# EAGLE board PWM (EAGLE 5.11)
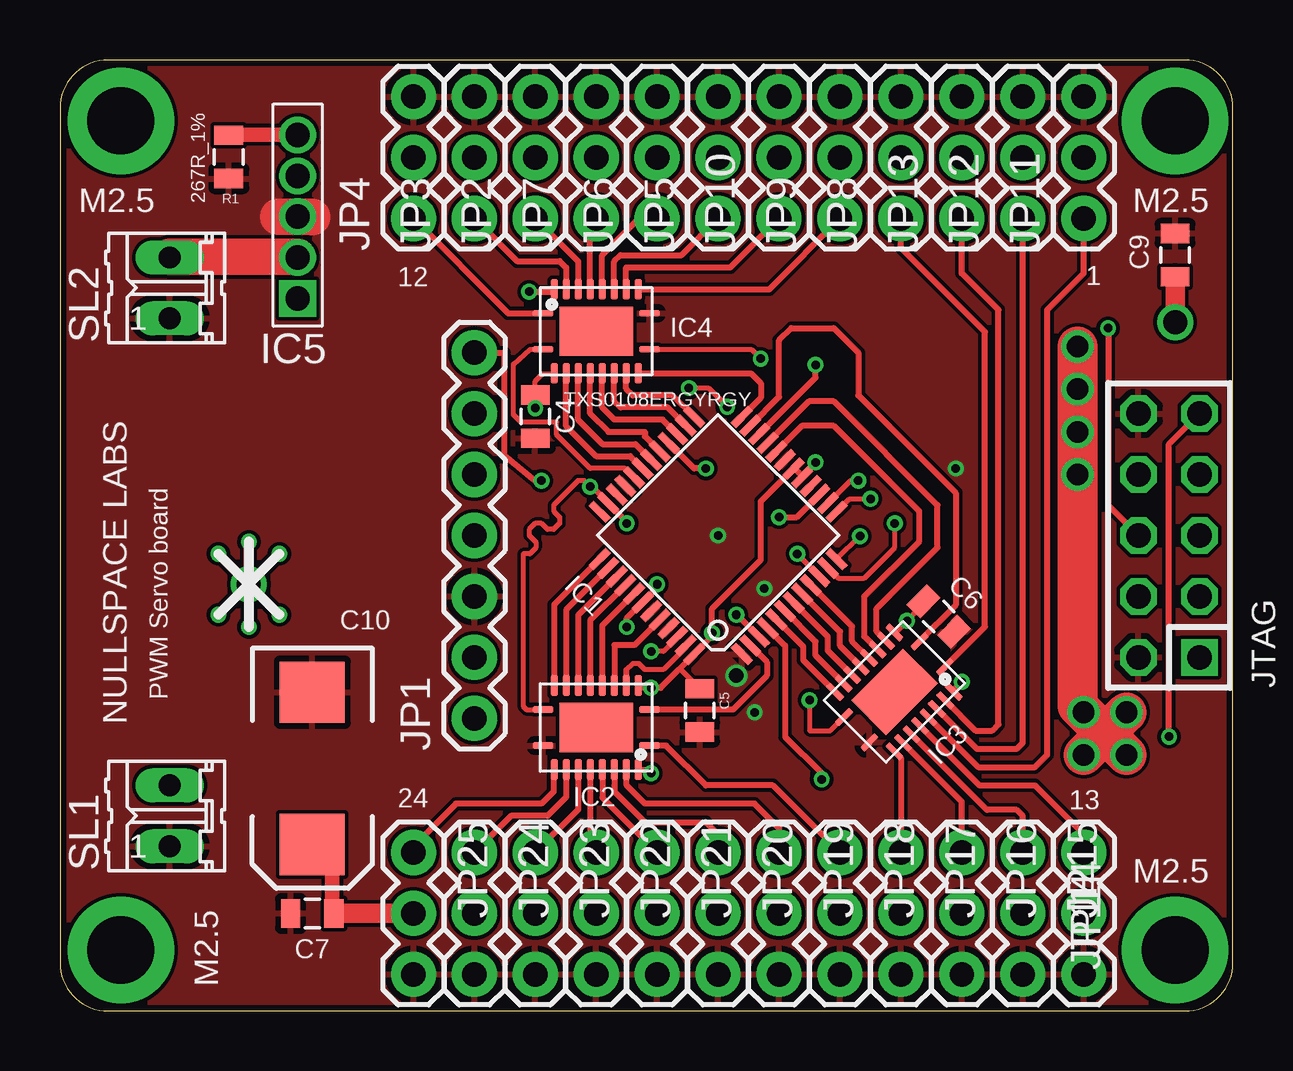
[diagram p0: board, top side]
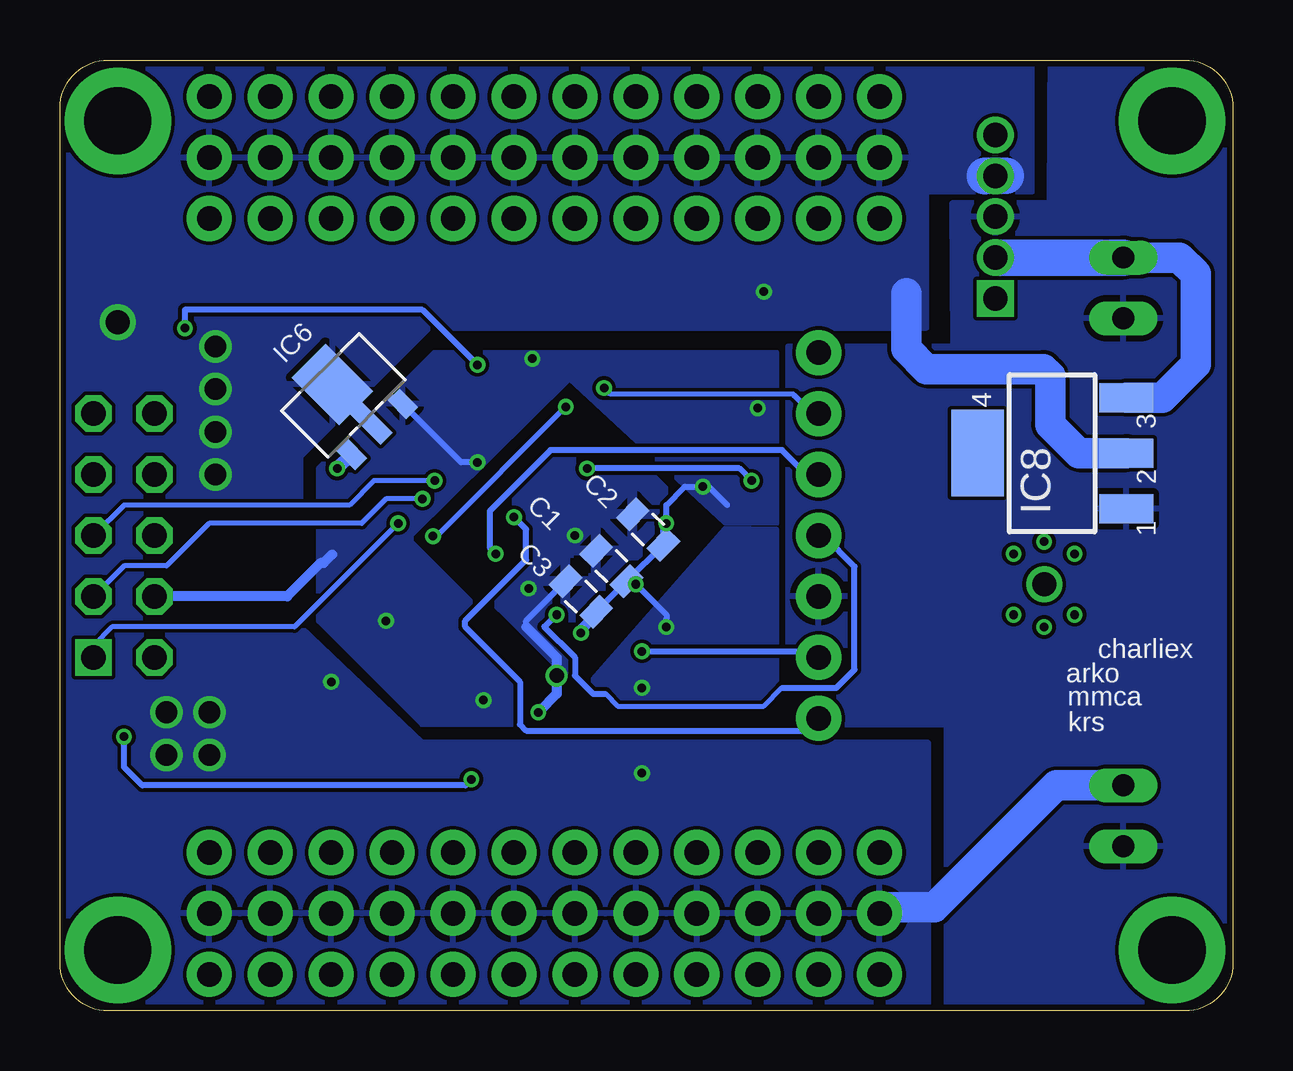
[diagram p1: board, bottom side, seen from below]

Size 48.89 x 39.62 mm. Coordinates in mm from the lower left corner, seen from the top.
Outline: 48.89,37.62 arc90 46.89,39.62 2,39.62 arc90 0,37.62 0,2 arc90 2,0 46.89,0 arc90 48.89,2 48.89,37.62
Copper layers (1*16): Top 0.035mm / dielectric 1.5mm / Bottom 0.035mm
Design rules "ITead_rule": minimum track width 6mil, minimum drill 12mil, track to track 6mil, track to pad 6mil, pad to pad 6mil, via to via 6mil, smd to smd 0mil, copper to edge 10mil, drill to drill 10mil, minimum pad ring 10mil, minimum via ring 6mil, stop-mask expansion 2mil, vias tented up to drill 100mil, thermal gap 10mil

## Footprints (pad centres in the part's own frame; a part is rotated, then mirrored left to right if it is on the bottom)
0805 = smd 0.8 x 1.2: 1 -0.9,0; 2 0.9,0
EIA7343 = smd 2.55 x 2.7: A 3.17,0; C -3.17,0
TQFP48 = smd 1.016 x 0.305: 1 -4.191,2.794; 2 -4.191,2.286; 3 -4.191,1.778; 4 -4.191,1.27; 5 -4.191,0.762; 6 -4.191,0.254; 7 -4.191,-0.254; 8 -4.191,-0.762; 9 -4.191,-1.27; 10 -4.191,-1.778; 11 -4.191,-2.286; 12 -4.191,-2.794; 25 4.191,-2.794; 26 4.191,-2.286; 27 4.191,-1.778; 28 4.191,-1.27; 29 4.191,-0.762; 30 4.191,-0.254; 31 4.191,0.254; 32 4.191,0.762; 33 4.191,1.27; 34 4.191,1.778; 35 4.191,2.286; 36 4.191,2.794 | smd 0.305 x 1.016: 13 -2.794,-4.191; 14 -2.286,-4.191; 15 -1.778,-4.191; 16 -1.27,-4.191; 17 -0.762,-4.191; 18 -0.254,-4.191; 19 0.254,-4.191; 20 0.762,-4.191; 21 1.27,-4.191; 22 1.778,-4.191; 23 2.286,-4.191; 24 2.794,-4.191; 37 2.794,4.191; 38 2.286,4.191; 39 1.778,4.191; 40 1.27,4.191; 41 0.762,4.191; 42 0.254,4.191; 43 -0.254,4.191; 44 -0.762,4.191; 45 -1.27,4.191; 46 -1.778,4.191; 47 -2.286,4.191; 48 -2.794,4.191
RGY = smd 0.85 x 0.28: 1 -2.225,-0.75; 10 2.225,-0.75; 11 2.225,0.75; 20 -2.225,0.75 | smd 0.28 x 0.85: 2 -1.75,-1.75; 3 -1.25,-1.75; 4 -0.75,-1.75; 5 -0.25,-1.75; 6 0.25,-1.75; 7 0.75,-1.75; 8 1.25,-1.75; 9 1.75,-1.75; 12 1.75,1.75; 13 1.25,1.75; 14 0.75,1.75; 15 0.25,1.75; 16 -0.25,1.75; 17 -0.75,1.75; 18 -1.25,1.75; 19 -1.75,1.75 | smd 3.05 x 2.05: E@1 0,0
SLTS284E = drill 1.016 pad 1.27 square: 1 -3.404,0 | drill 1.016 pad 1.27 round: 2 -1.702,0; 3 0,0; 4 1.702,0 | drill 1.016 round: 5 3.404,0
SOT89-3L = smd 0.7 x 1.1: 1 -1.5,-1.75; 3 1.5,-1.75 | smd 0.7 x 1.8: 2 0,-1.4 | smd 2 x 2.8: 4 0,0.9
V-REG-3_SOT223 = smd 1.219 x 2.235: 1 -2.311,-3.099; 2 0,-3.099; 3 2.311,-3.099 | smd 3.6 x 2.2: 4 0,3.099
1X07 = drill 1.016 pad 1.88 round: 1 0,0; 2 2.54,0; 3 5.08,0; 4 7.62,0; 5 10.16,0; 6 12.7,0; 7 15.24,0
1X03 = drill 1.016 pad 1.88 round: 1 0,0; 2 2.54,0; 3 5.08,0
AVR-JTAG-10 = drill 1.016 square: 1 -5.08,-1.27 | drill 1.016 octagon: 2 -5.08,1.27; 3 -2.54,-1.27; 4 -2.54,1.27; 5 0,-1.27; 6 0,1.27; 7 2.54,-1.27; 8 2.54,1.27; 9 5.08,-1.27; 10 5.08,1.27
02P = drill 0.914 long: 1 -1.27,0; 2 1.27,0

## Placement (x,y rotation side)
C1  .1uf  [0805]  25.91,18.54 135 bottom
C2  .1uf  [0805]  24.38,20.07 135 bottom
C3  .1uf  [0805]  27.18,17.27 135 bottom
C4  .1uf  [0805]  19.81,24.77 270 top
C5  .1uf  [0805]  26.67,12.52 270 top
C6  .1uf  [0805]  36.63,16.43 315 top
C7  10uf  [0805]  10.52,4.06 180 top
C9  .1uf  [0805]  46.48,31.5 90 top
C10  100uf  [EIA7343]  10.52,10.11 270 top
IC1  AT32UC3L016/32/64  [TQFP48]  27.43,19.81 135 top
IC2  TXS0108ERGYRGY  [RGY]  22.35,11.81 180 top
IC3  TXS0108ERGYRGY  [RGY]  34.78,13.3 225 top
IC4  TXS0108ERGYRGY  [RGY]  22.35,28.32 0 top
IC5  PTR08100W  [SLTS284E]  9.91,33.1 90 top
IC6  AP1115  [SOT89-3L]  36.9,25.47 45 bottom
IC8  [V-REG-3_SOT223]  7.54,23.24 90 bottom
JP1  [1X07]  17.27,12.19 90 top
JP2  [1X03]  19.81,33.02 90 top
JP3  [1X03]  17.27,33.02 90 top
JP4  [1X03]  14.73,33.02 90 top
JP5  [1X03]  27.43,33.02 90 top
JP6  [1X03]  24.89,33.02 90 top
JP7  [1X03]  22.35,33.02 90 top
JP8  [1X03]  35.05,33.02 90 top
JP9  [1X03]  32.51,33.02 90 top
JP10  [1X03]  29.97,33.02 90 top
JP11  [1X03]  42.67,33.02 90 top
JP12  [1X03]  40.13,33.02 90 top
JP13  [1X03]  37.59,33.02 90 top
JP14  [1X03]  42.67,6.6 270 top
JP15  [1X03]  40.13,6.6 270 top
JP16  [1X03]  37.59,6.6 270 top
JP17  [1X03]  35.05,6.6 270 top
JP18  [1X03]  32.51,6.6 270 top
JP19  [1X03]  29.97,6.6 270 top
JP20  [1X03]  27.43,6.6 270 top
JP21  [1X03]  24.89,6.6 270 top
JP22  [1X03]  22.35,6.6 270 top
JP23  [1X03]  19.81,6.6 270 top
JP24  [1X03]  17.27,6.6 270 top
JP25  [1X03]  14.73,6.6 270 top
JTAG  AVR-JTAG-10  [AVR-JTAG-10]  46.23,19.81 90 top
R1  267R_1%  [0805]  7.04,35.59 270 top
SL1  [02P]  4.57,8.13 90 top
SL2  [02P]  4.57,30.12 90 top

## Library data of the parts
C1-C7 C9 C10 JP1 R1 = SparkFun
IC1 JTAG = atmel-avr32-michel
IC2-IC6 = PWM
IC8 = avrcanbus
JP2-JP25 = Speaker_shield
SL1 SL2 = con-amp-quick; OC_FARNELL: unknown; OC_NEWARK: unknown

## Nets
3V3: C1.1 C2.1 C3.1 C4.1 C5.1 C6.1 IC1.17 IC1.18 IC1.35 IC1.42 IC1.48 IC2.2 IC2.10 IC3.2 IC3.10 IC4.2 IC4.10 IC6.3 JTAG.4
A09: IC2.20 JP18.1
A11: IC4.15 JP6.1
A12: IC2.18 JP19.1
A13: IC4.14 JP5.1
A15: IC2.12 JP25.1
A16: IC2.13 JP24.1
A17: IC2.14 JP23.1
A18: IC2.16 JP21.1
A19: IC2.15 JP22.1
A20: IC4.13 JP10.1
A21: IC4.12 JP9.1
A22: IC3.16 JP11.1
B00: IC3.13 JP16.1
B02: IC3.14 JP15.1
B03: IC3.15 JP14.1
B04: IC3.18 JP13.1
B05: IC3.17 JP12.1
B06: IC4.17 JP2.1
B07: IC4.18 JP3.1
B08: IC4.20 JP4.1
B09: IC4.16 JP7.1
B10: IC3.20 JP8.1
B11: IC2.17 JP20.1
B12: IC3.12 JP17.1
BATT_IN: IC5.2 IC8.3 SL2.2
GND: C1.2 C2.2 C3.2 C4.2 C5.2 C6.2 C7.2 C9.2 C10.C IC1.1 IC1.19 IC1.33 IC1.43 IC1.45 IC2.11 IC3.11 IC4.11 IC5.3 IC6.1 IC8.1 JP1.3 JP2.3 JP3.3 JP4.3 JP5.3 JP6.3 JP7.3 JP8.3 JP9.3 JP10.3 JP11.3 JP12.3 JP13.3 JP14.3 JP15.3 JP16.3 JP17.3 JP18.3 JP19.3 JP20.3 JP21.3 JP22.3 JP23.3 JP24.3 JP25.3 JTAG.2 JTAG.10 R1.2 SL1.1 SL2.1
MISO/RX: IC1.28 JP1.7
MOSI/TX: IC1.12 JP1.6
N$5: IC5.5 R1.1
N$9: IC5.1
PA09: IC1.2 IC2.1
PA11: IC1.27 IC4.6
PA12: IC1.47 IC2.3
PA13: IC1.26 IC4.7
PA14: IC1.36
PA15: IC1.37 IC2.9
PA16: IC1.38 IC2.8
PA17: IC1.39 IC2.7
PA18: IC1.41 IC2.5
PA19: IC1.40 IC2.6
PA20: IC1.25 IC4.8
PA21: IC1.24 IC4.9
PA22: IC1.9 IC3.5
PB00: IC1.6 IC3.8
PB01: IC1.16
PB02: IC1.7 IC3.7
PB03: IC1.8 IC3.6
PB04: IC1.21 IC3.3
PB05: IC1.20 IC3.4
PB06: IC1.30 IC4.4
PB07: IC1.31 IC4.3
PB08: IC1.32 IC4.1
PB09: IC1.29 IC4.5
PB10: IC1.23 IC3.1
PB11: IC1.44 IC2.4
PB12: IC1.5 IC3.9
RESETN: IC1.22 JTAG.6
SCK: IC1.10 JP1.5
SPI_SS: IC1.3 JP1.4
TCK: IC1.11 JTAG.1
TDI: IC1.4 JTAG.9
TDO: IC1.13 JTAG.3
TMS: IC1.14 JTAG.5
TWCK: IC1.15 JP1.1
TWD: IC1.46 JP1.2
VREF: IC1.34
VREG: C7.1 C9.1 C10.A IC2.19 IC3.19 IC4.19 IC5.4 IC6.2 IC6.4 IC8.2 JP2.2 JP3.2 JP4.2 JP5.2 JP6.2 JP7.2 JP8.2 JP9.2 JP10.2 JP11.2 JP12.2 JP13.2 JP14.2 JP15.2 JP16.2 JP17.2 JP18.2 JP19.2 JP20.2 JP21.2 JP22.2 JP23.2 JP24.2 JP25.2 SL1.2

## Tracks (layer width: path | path; a pad name or v marks a point on that pad's centre or on a via)
3V3  (via drill 0.36)
  Top 0.203: IC4.2 20.6,26.54 20.12,26.54 19.81,26.24 C4.1 v19.81,25.12 | C5.1 25.86,14.23 25.8,14.23 | v35.31,16.26 36.04,16.99 C6.1 | IC4.10 28.82,27.57 v29.21,27.18 | IC3.10 32.11,11.68 31.24,11.68 v31.24,12.95 | IC2.10 19.44,12.56 19.3,12.7 19.3,19.05 19.58,19.05 19.84,19.3 19.84,19.53 19.56,19.81 19.56,20.07 19.81,20.32 20.07,20.32 20.32,20.07 20.57,20.07 20.83,20.32 20.83,20.57 20.57,20.83 20.57,21.08 21.59,22.1 21.84,22.1 v22.1,21.84
  Top 0.254: IC3.2 34.82,15.77 v35.31,16.26 | IC2.2 24.2,13.46 v24.64,13.46 25.03,13.46 25.8,14.23 IC1.48 27.18,15.61 v27.18,15.75 27.18,16.76 29.21,18.8 29.21,21.23 IC1.18 30.64,22.6 30.93,22.3 | v23.62,16 23.62,16.36 IC1.42 24.89,17.63 v24.89,17.78 | v22.1,21.84 22.17,21.84 IC1.35 23.62,20.39 v23.62,20.32 | 30.93,22.3 v31.5,22.86 | 30.93,22.3 IC1.17
  Bottom 0.203: v19.81,25.12 19.81,25.07
  Bottom 0.254: 23.62,16.36 v23.62,16 23.62,16.51 v24.89,17.78 25.27,18.16 C1.1 | C3.1 26.8,16.13 v27.18,15.75 27.18,16 C1.1 | IC6.3 32.17,22.86 v31.5,22.86 | C1.1 C2.1 23.75,20.19 v23.62,20.32 23.62,21.08 22.86,21.84 v22.1,21.84 21.84,21.84 21.08,21.08
  Bottom 0.406: JTAG.4 39.42,17.27 38.02,18.67 37.9,18.67 37.54,19.03
  pour Bottom: 21.16,20.35 27.66,26.37 34.29,19.81 34.29,19.56 27.69,12.95 27.43,12.95 21.13,20.12 19.05,20.07 19.05,11.94 33.78,11.94 38.1,16.26 38.1,22.61 33.27,27.43 19.05,27.43 19.05,20.32
A09
  Top 0.254: IC2.20 25.26,11.06 26.92,9.4 29.72,9.4 JP18.1
A11
  Top 0.254: IC4.15 22.6,31.49 24.13,33.02 JP6.1
A12
  Top 0.254: IC2.18 23.62,10.04 23.62,9.4 24.38,8.64 28.96,8.64 29.97,7.62 JP19.1
A13
  Top 0.254: IC4.14 23.1,31.23 23.37,31.5 25.91,31.5 JP5.1
A15
  Top 0.254: IC2.12 20.57,10.03 20.57,9.14 20.07,8.64 16.51,8.64 14.73,6.86 JP25.1
A16
  Top 0.254: IC2.13 21.1,8.91 21.08,8.89 20.32,8.13 18.8,8.13 JP24.1
A17
  Top 0.254: IC2.14 21.6,8.39 JP23.1
A18
  Top 0.254: IC2.16 22.61,8.89 JP21.1
A19
  Top 0.254: IC2.15 22.1,6.85 JP22.1
A20
  Top 0.254: IC4.13 23.6,30.97 23.62,30.99 27.94,30.99 JP10.1
A21
  Top 0.254: IC4.12 29.56,30.07 JP9.1
A22
  Top 0.254: IC3.16 38.27,10.16 40.64,10.16 41.15,10.67 41.15,29.21 42.67,30.73 JP11.1
B00
  Top 0.254: IC3.13 37.59,8.72 JP16.1
B02
  Top 0.254: IC3.14 38.64,8.38 39.88,8.38 40.13,8.13 JP15.1
B03
  Top 0.254: IC3.15 38.33,9.4 40.64,9.4 42.67,7.37 JP14.1
B04
  Top 0.254: JP13.1 37.59,30.73 39.12,29.21 39.12,11.94 38.86,11.68 38.16,11.68 IC3.18
B05
  Top 0.254: IC3.17 38.22,10.92 39.88,10.92 40.13,11.18 JP12.1
B06
  Top 0.254: IC4.17 21.6,31.23 JP2.1
B07
  Top 0.254: IC4.18 21.1,30.97 20.83,31.24 19.05,31.24 JP3.1
B08
  Top 0.254: IC4.20 18.68,29.07 JP4.1
B09
  Top 0.254: IC4.16 22.1,32.77 JP7.1
B10
  Top 0.254: IC3.20 38.56,16.01 38.56,28.3 35.05,31.8 JP8.1
B11
  Top 0.254: IC2.17 23.11,10.05 23.11,9.4 23.11,9.14 24.38,7.87 26.92,7.87 27.43,7.37 JP20.1
B12
  Top 0.254: IC3.12 35.05,10.55 JP17.1
BATT_IN
  Top 0.305: SL2.2 4.57,31.42
  Top 1.524: 4.57,31.42 9.91,31.42
  Bottom 1.27: SL2.2 2.23,31.39 1.55,30.71 1.55,26.95 2.95,25.55 IC8.3
  Bottom 1.524: IC5.2 SL2.2
GND  (via drill 0.36, 0.6)
  Top 1.524: 9.09,33.1 IC5.3 10.52,33.1 10.52,33.07
  Bottom 0.254: IC6.1 36.77,23.18 | C3.2 29.46,16.26 29.46,16
  Bottom 0.406: 29.46,16 28.19,14.73 v28.19,13.97 28.19,13.21 v28.96,12.45
  Bottom 0.559: 36.77,23.18 v37.34,22.61
  other vias: 27.43,19.81 29.36,17.6
  pour Top: 49.02,40.64 49.02,-1.02 -0.76,-0.76 -0.76,39.89 arc-90 0.24,40.89
  pour Bottom: -0.51,40.39 7.62,40.39 7.65,33.66 11.71,33.66 11.68,27.69 18.54,27.69 18.54,11.94 11.94,11.94 11.94,-0.76 -0.51,-0.76
  pour Bottom: 21.95,19.96 27.53,25.58 33.02,20.07 33.27,19.56 27.69,13.97
MISO/RX  (via drill 0.36)
  Top 0.254: JP1.7 18.52,27.43 18.52,23.17 19.81,22.1 v20.07,22.1 | IC1.28 26.43,22.61 v26.92,22.61
  Bottom 0.254: v20.07,22.1 20.57,22.61 v26.92,22.61
MOSI/TX  (via drill 0.36)
  Top 0.203: v27.81,25.17 27.03,25.96 v26.21,25.96 | IC1.12 33.33,19.79 v33.35,19.79
  Bottom 0.203: 18.29,25.65 18.34,25.71 25.96,25.71 v26.21,25.96 | v27.81,25.17 33.2,19.79 v33.35,19.79
  Bottom 0.254: 18.29,25.65 17.53,24.89 JP1.6
N$1  (via drill 2.79 pad 4.45)
  other vias: 46.48,37.08
N$2  (via drill 2.79 pad 4.45)
  other vias: 46.48,2.54
N$3  (via drill 2.79 pad 4.45)
  other vias: 2.54,2.54
N$4  (via drill 2.79 pad 4.45)
  other vias: 2.54,37.08
N$5
  Top 0.61: IC5.5 7.11,36.5 R1.1
N$6  (via drill 0.36, 1)
  Top 0.406: v7.87,17.78 v7.87,19.56 | v9.14,19.05 v7.87,17.78 | v7.87,17.78 v6.6,19.05 | v7.87,17.78 v6.6,16.51 | v7.87,17.78 v9.14,16.51 | v7.87,17.78 v7.87,16
PA09
  Top 0.254: IC2.1 28.05,12.56 29.46,13.97 29.46,14.55 IC1.2
PA11
  Top 0.254: IC1.27 25.12,24.64 23.11,24.64 22.6,25.15 IC4.6
PA12
  Top 0.203: 23.6,14.2 23.88,14.48 24.13,14.48 24.38,14.22 25.15,14.22 26.09,15.16 IC1.47
  Top 0.254: 23.6,14.2 IC2.3
PA13
  Top 0.254: IC1.26 25.33,25.15 23.37,25.15 23.1,25.41 IC4.7
PA15
  Top 0.254: IC1.37 20.6,16.93 IC2.9
PA16
  Top 0.254: IC1.38 21.1,16.71 IC2.8
PA17
  Top 0.254: IC1.39 21.6,16.5 IC2.7
PA18
  Top 0.254: IC1.41 22.6,16.06 IC2.5
PA19
  Top 0.254: IC1.40 22.1,16.28 IC2.6
PA20
  Top 0.254: IC4.8 23.6,25.93 23.88,25.65 25.54,25.65 IC1.25
PA21
  Top 0.254: IC1.24 29.21,25.54 29.21,26.16 28.8,26.57 IC4.9
PA22
  Top 0.254: IC1.9 33.02,16.02 33.02,15.41 IC3.5
PB00
  Top 0.254: IC1.6 31.5,15.39 31.5,14.82 IC3.8
PB02
  Top 0.254: IC1.7 32,15.6 32,15.02 IC3.7
PB03
  Top 0.254: IC1.8 32.51,15.81 32.51,15.21 IC3.6
PB04
  Top 0.254: IC3.3 34.04,15.81 34.04,16.76 36.58,19.3 36.58,21.08 32.26,25.4 31.22,25.4 IC1.21
PB05
  Top 0.254: IC3.4 33.53,15.61 33.53,17.27 35.81,19.56 35.81,20.83 32.26,24.38 30.93,24.38 IC1.20
PB06
  Top 0.254: IC1.30 23.98,23.62 22.61,23.62 21.6,24.63 IC4.4
PB07
  Top 0.254: IC1.31 23.77,23.11 22.35,23.11 21.1,24.36 IC4.3
PB08
  Top 0.203: IC1.32 23.56,22.61 22.1,22.61 20.7,24 20.7,24.54 19.23,24.54 18.9,24.84 18.9,26.95 19.59,27.57 IC4.1
  Top 0.254: IC4.1 19.95,27.57
PB09
  Top 0.254: IC1.29 24.38,23.94 24.38,24.13 22.86,24.13 22.1,24.89 IC4.5
PB10
  Top 0.254: IC3.1 37.34,16.91 37.34,21.59 33.27,25.65 33.27,27.43 32.26,28.45 30.48,28.45 29.97,27.94 29.97,25.59 IC1.23
PB11
  Top 0.254: IC1.44 23.94,15.24 23.11,15.24 23.11,13.57 IC2.4
PB12
  Top 0.254: IC1.5 30.99,15.18 30.99,14.62 IC3.9
RESETN  (via drill 0.36)
  Top 0.254: IC1.22 31.5,26.39 v31.5,26.92 | v43.69,28.45 43.69,21.08 JTAG.6
  Bottom 0.254: v31.5,26.92 33.78,29.21 43.69,29.21 v43.69,28.45
SCK  (via drill 0.36)
  Top 0.203: IC1.10 30.73,19.03 v30.73,19.05
  Bottom 0.254: v30.73,19.05 30.99,19.3 30.99,20.83 28.45,23.37 18.8,23.37 17.78,22.35 JP1.5
SPI_SS  (via drill 0.36)
  Top 0.254: v28.19,16.51 28.22,16.51 IC1.3
  Bottom 0.203: 26.16,13.21 25.65,12.7 19.56,12.7 18.8,13.46
  Bottom 0.254: 26.16,13.21 26.67,13.21 27.43,13.97 27.43,14.73 28.71,16.02 28.69,16.02 v28.19,16.51 | 18.8,13.46 16.54,13.46 15.77,14.22 15.77,18.52 17.07,19.81 JP1.4
TCK  (via drill 0.36)
  Top 0.203: v34.8,20.32 34.8,19.3 33.53,18.03 32.44,18.03 IC1.11
  Bottom 0.203: JTAG.1 47.5,15.24 46.74,16 39.12,16 v34.8,20.32
TDI  (via drill 0.36)
  Top 0.254: JTAG.9 46.23,23.62 v46.23,11.43 | IC1.4 30.23,15.22 30.23,11.43 31.75,9.91 v31.75,9.65
  Bottom 0.254: v31.75,9.65 32,9.4 45.47,9.4 46.23,10.16 v46.23,11.43
TDO  (via drill 0.36)
  Top 0.203: IC1.13 32.91,21.34 v33.78,21.34
  Bottom 0.203: v33.78,21.34 35.31,21.34 36.32,20.32 42.67,20.32 43.05,19.94 43.18,19.81 44.45,18.54 46.23,18.54 JTAG.3
TMS  (via drill 0.36)
  Top 0.203: IC1.14 32.95,22.1 v33.27,22.1
  Bottom 0.203: v33.27,22.1 35.81,22.1 36.83,21.08 46.23,21.08 JTAG.5
TWCK  (via drill 0.36)
  Top 0.254: IC1.15 30.71,20.57 v29.97,20.57
  Bottom 0.254: v29.97,20.57 29.46,20.07 29.46,18.8 32,16.26 32,16 29.72,13.72 29.72,11.94 29.46,11.68 17.78,11.68 JP1.1
TWD  (via drill 0.36)
  Top 0.203: IC1.46 25.73,15.57 25.15,14.99 v24.64,14.99
  Bottom 0.254: JP1.2 17.53,14.99 v24.64,14.99
VREG  (via drill 0.36, 0.9, 1)
  Top 0.254: IC2.19 24.48,10.06 v24.64,9.91 | IC3.19 arc-45 37.32,13.44 v37.59,13.72 | IC4.19 20.5,29.97 v19.56,29.97
  Top 0.61: C7.1 11.35,4.13 11.35,6.53 10.94,6.94 C10.A
  Top 0.813: C7.1 JP25.2 | v46.48,28.7 C9.1
  Top 1.676: v42.42,27.69 42.42,12.7 v44.45,10.67 | v42.67,10.67 v44.45,12.45
  Bottom 0.254: IC6.2 IC6.4
  Bottom 1.27: SL1.2 7.37,9.4 12.45,4.32 14.48,4.32 JP25.2 | IC8.2 6.43,23.24 7.62,24.44 7.62,26.47 7.9,26.75 12.78,26.75 13.61,27.58 13.61,29.9
  Bottom 1.524: 9.47,34.8 10.34,34.8 10.34,34.77
  other vias: 42.67,12.45 42.42,22.35 42.42,24.13 42.42,25.91
  pour Bottom: 8.38,40.13 48.77,39.88 48.77,-1.02 12.7,-0.76 12.7,11.18 33.78,11.18 38.86,16 38.86,23.11 33.53,28.45 12.78,28.47 12.78,34.16 8.38,34.14

## Text on the board
tPlace: M2.5 | M2.5 | 1 | 12 | PWM Servo board | NULLSPACE LABS | 24 | 13 | M2.5 | M2.5
bPlace: charliex | arko | mmca | krs